# Altium PCB MBOARD.PCBDOC
Units mil, origin at the board's own origin, x right, y up, seen from the top; angles counter-clockwise.
Board outline 6265 x 3760 mil, 2 copper layers (Top Layer, Bottom Layer); 31 components, 23 nets, 121 pads, 15 vias.
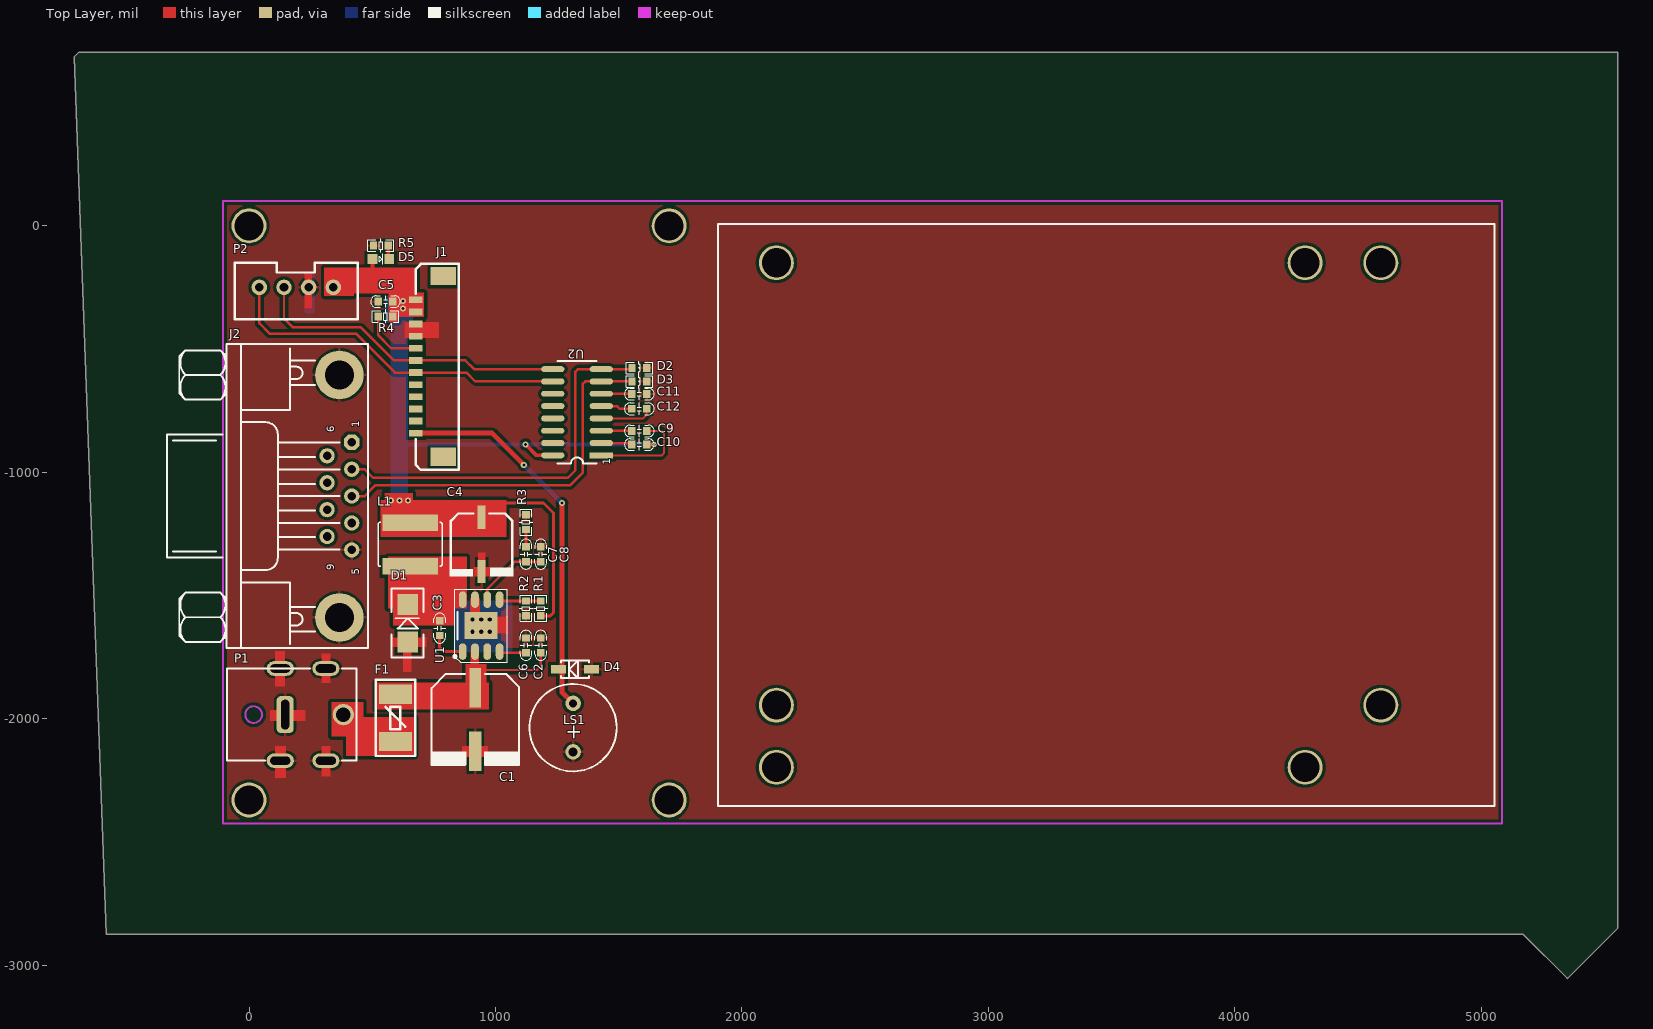
[diagram p0: Top Layer view]
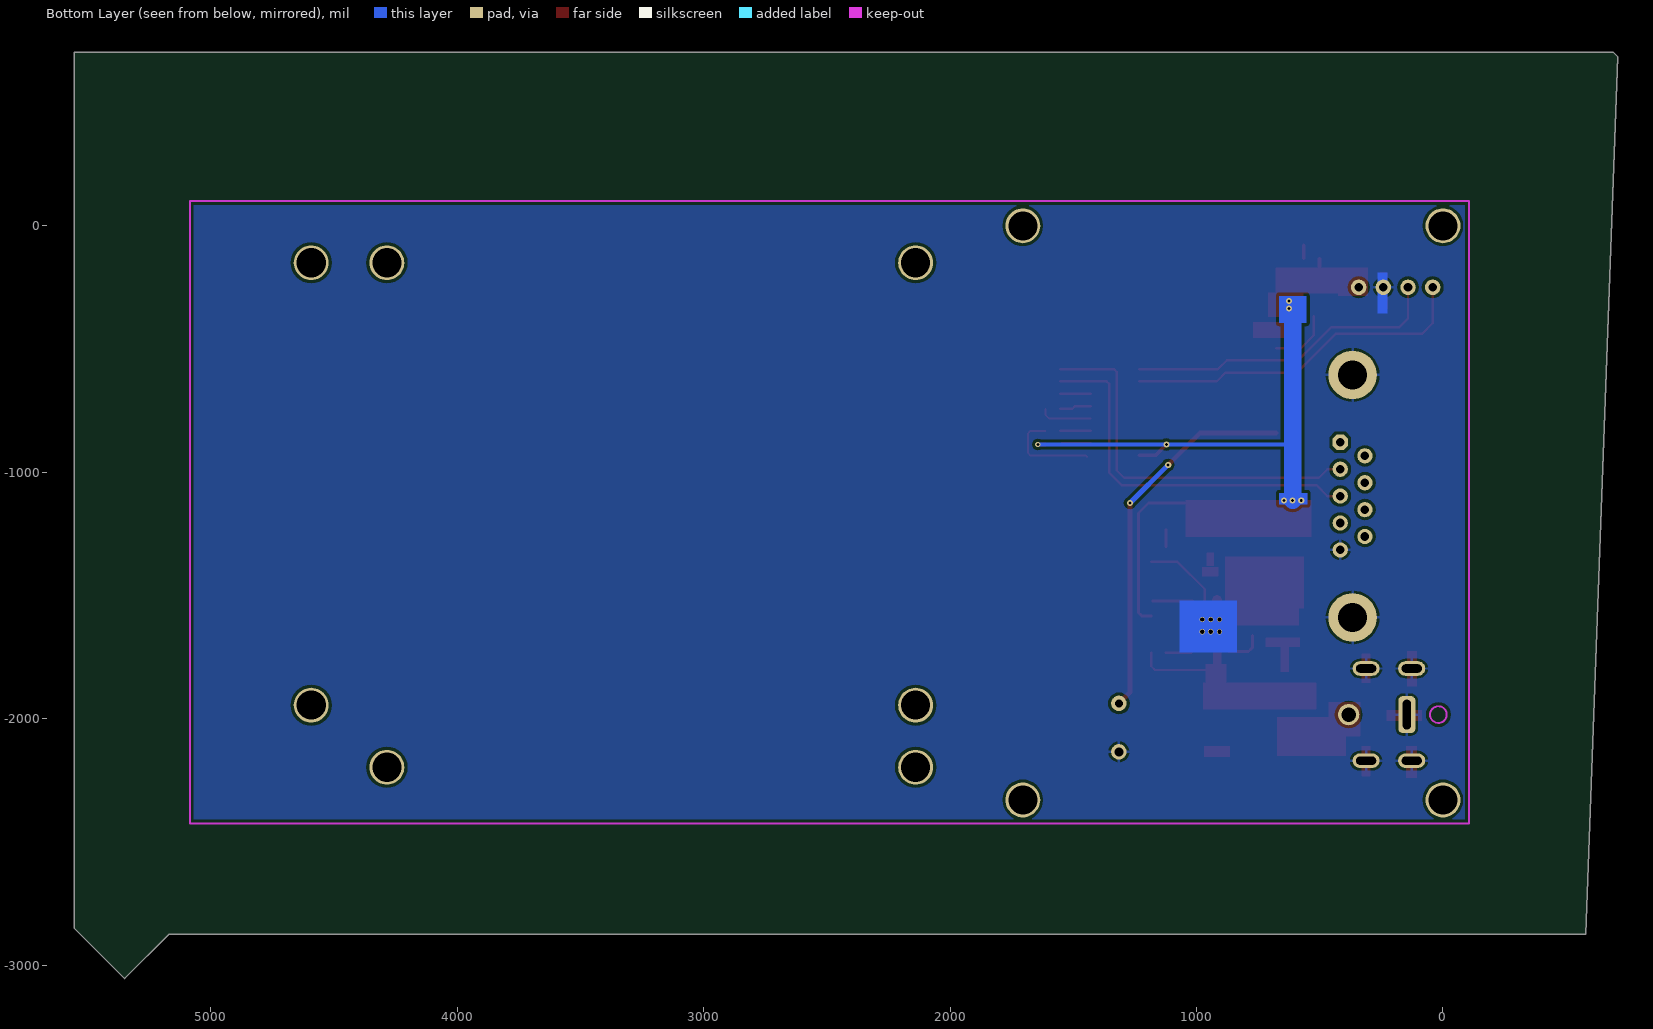
[diagram p1: Bottom Layer view, seen from below]

## Layer stack, top to bottom
Top Solder: solder mask 0.4, Solder Resist, Dk 3.5
Top Layer: signal copper 1.4
Dielectric1: core 12.6, FR-4, Dk 4.8
Bottom Layer: signal copper 1.4
Bottom Solder: solder mask 0.4, Solder Resist, Dk 3.5

## Board outline
-710,685 -690,705 5555,705 5555,-2850 5350,-3055 5170,-2875 -580,-2875

## Design rules (kind name [scope] priority, off if disabled: settings)
Clearance [All] p1: gap=12
ComponentClearance [All] p1 off: gap=10 collisioncheckmode=3 verticalgap=10 showdistances=FALSE
FabricationTestPointUsage TestPointUsage [All] p1: valid=0 allowmultiple=FALSE
FabricationTestpoint Testpoint [(IsPad And (OnTopLayer Or OnBottomLayer))] p1: side=3 testpointundercomponent=TRUE minsize=40 maxsize=100 preferedsize=60 minholesize=0 maxholesize=40 preferedholesize=32 testpointgrid=1 allowsidetop=TRUE allowsidebottom=TRUE usegrid=TRUE gridtolerance=0.01
HoleSize [All] p1: absolutevalues=TRUE maxlimit=100 minlimit=0 maxpercent=80.000 minpercent=20.000
PolygonConnect [All] p1: connectstyle=Relief reliefconductorwidth=12 reliefentries=4 polygonreliefangle="90 Angle" airgapwidth=10
RoutingVias [All] p1: holewidth=15 width=25 viastyle="Through Hole" minholewidth=8 minwidth=15 maxholewidth=80 maxwidth=50
SolderMaskExpansion [All] p1: expansion=4
Width [All] p1: maxlimit=100 minlimit=8 preferedwidth=10 minimp=50.000000 maximp=50.000000 favimp=50.000000
26 further rules are at their usual default settings.

## Components (designator, comment, footprint, x,y, rotation, side; value= is the part's Value field where it differs from the comment)
C1 "Cap Pol1" C8x10-SMD 917.78,-2003.52 r270 top
C2 "Cap" 0603C 1183.78,-1702.52 r180 top
C3 "Cap" 0603C 773.78,-1632.52 r0 top
C4 "Cap Pol1" C6.3x5.4-SMD 943.78,-1292.52 r270 top
C5 "Cap" 0603C 553.78,-307.52 r270 top
C6 "Cap" 0603C 1123.78,-1702.52 r180 top
C7 "Cap" 0603C 1123.78,-1332.52 r0 top
C8 "Cap" 0603C 1183.78,-1332.52 r0 top
C9 "0.1uF" 0603C 1583.78,-832.52 r270 top
C10 "0.1uF" 0603C 1583.78,-887.52 r90 top
C11 "0.1uF" 0603C 1583.78,-682.52 r90 top
C12 "0.1uF" 0603C 1583.78,-742.52 r270 top
D1 "SS54" SMA 643.78,-1612.52 r90 top
D2 "ESD" 0603L 1583.78,-577.52 r270 top
D3 "ESD" 0603L 1583.78,-632.52 r270 top
D4 "1N4007W" SOD-123 1390,-1800 r270 top
D5 "LED" 0603-LED 535,-135 r0 top
F1 "Fuse Thermal" 1812F 593.78,-2092.52 r90 top
J1 "Interface" 1.25-12P 676.78,-180.52 r270 top
J2 "DB9" DB-9/M 416.78,-878.52 r0 top
L1 "Inductor" L-6045 653.78,-1382.52 r90 top
LS1 "Bell" BEEP-9x5.5 1315,-2135 r90 top
P1 "POW" DC-5525 126.78,-2170.52 r90 top
P2 "TTL" XH2.54-4P 241.78,-249.52 r180 top
R1 "Res Semi" 0603R 1183.78,-1552.52 r0 top
R2 "Res Semi" 0603R 1123.78,-1552.52 r0 top
R3 "Res Semi" 0603R 1123.78,-1202.52 r0 top
R4 "Res Semi" 0603R 553.78,-367.52 r270 top
R5 "Res1" 0603R 535,-80 r90 top
U1 "TPS54331" SOP8-POW 941.78,-1622.52 r90 top
U2 "SP3232EEN" SOIC16-1.27 1333.78,-782.52 r180 top

## Footprints (in the part's own frame and the unit in brackets; to place one, negate y for a bottom-side part, rotate by r counter-clockwise, add the part's x,y. Pads: shape width x height; smd on the part's side, far side on the other; paste and mask are expansions set on the pad)
1.25-12P [mm]
  rect 1.9x2.6 smd: 0(0.591,2.835) 0(19.241,2.835)
  rect 0.7x1.4 smd: 1(16.791,0) 2(15.541,0) 3(14.291,0) 4(13.041,0) 5(11.791,0) 6(10.541,0) 7(9.291,0) 8(8.041,0) 9(6.791,0) 10(5.541,0) 11(4.291,0) 12(3.041,0)
  silkscreen extent -0.66,0 20.57,4.45
0603-LED [mm]
  rect 1x1 smd: 1(-0.864,0) 2(0.864,0)
  silkscreen extent -0.18,-0.51 0.18,0.56
0603C [mil]
  rect 31.5x30 smd: 1(0,30) 2(0,-30)
  silkscreen extent -24,-60 24,60
0603L [mil]
  rect 31.5x30 smd: 1(-0.91,-29.91) 2(-0.91,30.09)
  silkscreen extent -28,-54 27,54
0603R [mil]
  rect 31.5x30 smd: 1(0,30) 2(0,-30)
  silkscreen extent -28,-53 28,53
1812F [mm]
  rect 2x3.4 smd: 1(0,0) 2(4.85,0)
  silkscreen extent -1.5,-2.03 6.35,2.03
BEEP-9x5.5 [mm]
  round 1.6 hole 0.8: 1(5,0)
  round 1.6 hole 0.9: 2(0,0)
  silkscreen extent -2,-4.5 7,4.5
C6.3x5.4-SMD [mm]
  rect 2.4x0.85 smd: 1(-2.794,0) 2(2.794,0)
  silkscreen extent -3.18,-3.3 3.3,3.3, body extent -3.24,-3.18 3.24,3.18, height 3.5
C8x10-SMD [mm]
  rect 4.1x1.148 smd: 1(-3.277,0)
  rect 4.1x1.25 smd: 2(3.277,0)
  silkscreen extent -4.7,-4.5 4.7,4.5, body extent -4.65,-4.25 4.65,4.25, height 10.5
DB-9/M [mil]
  oct 62x62 hole 35: 1(0,0)
  round 62 hole 35: 2(0,-109.17) 3(0,-218.33) 4(0,-327.5) 5(0,-436.67) 6(-100,-55) 7(-100,-164.17) 8(-100,-273.33) 9(-100,-382.5)
  round 196.67 hole 118.33: BO1(-50,-710.83) BO2(-50,273.33)
  silkscreen extent -750,-835 67,398
DC-5525 [mm]
  oval 1.5x2.8 hole 0.85 slot 2.06 at 90 deg: 1(0,0) 1(0,-4.7) 1(9.5,-4.7) 1(9.5,0)
  rrect50% 3.8x1.75 hole 0.83 slot 3.05 at 0 deg: 1(4.75,-0.5)
  round 2.2 hole 1.5: 2(4.75,-6.5)
  Keep-Out Layer circle w0.2: c4.75,2.75 r0.86
  silkscreen extent 0,-7.87 9.53,5.5
L-6045 [mm]
  rect 1.7x5.7 smd: 1(0,0) 2(4.5,0)
  silkscreen extent 0,-3.3 4.57,3.3
SMA [mm] "Molded Diode, 2-Leads, Body 4.3x2.7mm, IPC Medium Density"
  rect 2.15x2.15 smd: 1(-1.93,0) 2(1.93,0)
  silkscreen extent -3.56,-1.65 3.56,1.65, body extent -2.28,-1.42 2.29,1.42, height 2.95
SOD-123 [mm]
  rect 0.85x1.524 smd: 1(0,0) 2(0,-3.4)
  silkscreen extent -0.9,-3.15 0.9,-0.25
SOIC16-1.27 [mm]
  rect 2.4x0.6 smd: 1(-2.432,3.787)
  oval 2.4x0.6 smd: 2(-2.432,2.517) 3(-2.432,1.247) 4(-2.432,-0.023) 5(-2.432,-1.293) 6(-2.432,-2.563) 7(-2.432,-3.833) 8(-2.432,-5.103) 9(2.568,-5.103) 10(2.568,-3.833) 11(2.568,-2.563) 12(2.568,-1.293) 13(2.568,-0.023) 14(2.568,1.247) 15(2.568,2.517) 16(2.568,3.787)
  silkscreen extent -1.93,-5.96 2.07,4.64
SOP8-POW [mm]
  oval 1.7x0.8 smd: 1(-2.675,1.905) 2(-2.675,0.635) 3(-2.675,-0.635) 4(-2.675,-1.905) 5(2.675,-1.905) 6(2.675,-0.635) 7(2.675,0.635) 8(2.675,1.905)
  rect 2.8x3.4 smd: 9(0,0)
  silkscreen extent -3.78,-2.7 3.77,2.82
XH2.54-4P [mil]
  round 63 hole 35.5: 1(-100,0) 2(0,0) 3(100,0) 4(200,0)
  silkscreen extent -200,-100 300,130

## Part data
C1 C4: "Polarized Capacitor (Radial)"
C2 C3 C5 C6 C7 C8: "Capacitor"
C9 C10 C11 C12: library part 电容, "电容"
D1: library part "D Schottky", "Schottky Diode"
D2 D3: library part 电感
D4: library part "Diode 1N5408", "3 Amp Medium Power Silicon Rectifier Diode"
D5: library part LED1, "Typical RED GaAs LED"
F1: "Thermal Fuse"
J1: library part "Header 12", "Header, 12-Pin"
LS1: "Electrical Bell"
P1: library part "Header 2", "Header, 2-Pin"
P2: library part "Header 4", "Header, 4-Pin"
R1 R2 R3 R4: "Semiconductor Resistor"
R5: "Resistor"
U2: library part MAX232ESE

## Free pads (board coordinates)
  round 141.73 hole 118.11: 8(0,-2330) 8(0,0) 8(1705,-2330) 8(1705,0) 8(2140,-2197.24) 8(2140,-1945.28) 8(2140,-150) 8(4285.67,-2197.24) 8(4285.67,-150) 8(4592.76,-1945.28) 8(4592.76,-150)

## Via types
v1: diameter 25, hole 12, Top Layer to Bottom Layer, 8 vias
v2: diameter 22, hole 18, Top Layer to Bottom Layer, 6 vias
v3: diameter 22, hole 12, Top Layer to Bottom Layer, 1 vias

## Nets (pads, with @x,y where several pads share a name; then routed paths per layer and width w, separated by ;. In a path a pad name is that pad's centre, name@x,y a point inside that pad or via, vN(x,y) a via of type N, cw(c..) or ccw(c..) an arc to the next point about the centre after c; other vN are vias at no path point)
+5V: C4.1 C5.1 C10.2 D5.1 J1.11 J1.12 L1.2 P2.1 R1.2 R4.1 U2.16 | length 2728.7
  Top Layer w12: 1025,-1125 1195,-1125 1235,-1165 1235,-1570 1222.48,-1582.52 R1.2
  Top Layer w15: 501,-216 D5.1 ; v1(1122.52,-887.52) 1166.61,-931.61 U2.16 ; C10.2 v3(1643.78,-887.52)
  Bottom Layer w15: 612.52,-887.52 v3(1643.78,-887.52)
  Bottom Layer w70: v1(610,-1115) 610,-345
  other v1: 575,-1115 645,-1115 625,-335 625,-305
GND: C1.2 C2.2 C4.2 C5.2 C6.2 C8.1 C11.2 D1.1 D2.2 D3.2 D4.1 J1.9 J1.10 J2.5 J2.BO1 J2.BO2 LS1.2 P1.1 P2.2 R2.2 R3.1 R5.1 U1.7 U1.9 U2.15 | length 80.3
  Top Layer w40: U1.9@916.78,-1597.52 U1.7
  other v2: 906.78,-1647.52 941.78,-1647.52 976.78,-1647.52 906.78,-1597.52 941.78,-1597.52 976.78,-1597.52
NetC1_1: C1.1 C2.1 F1.2 U1.2 | length 296.2
  Top Layer w10: 948.78,-1802.52 1168.78,-1802.52 1183.78,-1787.52 C2.1
NetC3_1: C3.1 D1.2 L1.1 U1.8
NetC3_2: C3.2 U1.1 | length 149.3
  Top Layer w12: C3.2 773.78,-1712.52 789.09,-1727.83 U1.1
NetC6_1: C6.1 U1.4 | length 102.3
  Top Layer w12: U1.4@1021.46,-1732.52 C6.1
NetC7_1: C7.1 R3.2 | length 70
  Top Layer w12: C7.1 R3.2
NetC7_2: C7.2 C8.2 U1.6 | length 306.1
  Top Layer w10: U1.6 966.78,-1474.52 1078.78,-1362.52 C7.2 C8.2
NetC9_1: C9.1 U2.1 | length 400.4
  Top Layer w8: U2.1@1443.78,-937.52 1448.78,-932.52 1673.78,-932.52 1683.78,-922.52 1683.78,-842.52 1673.78,-832.52 C9.1
NetC9_2: C9.2 U2.3 | length 123.3
  Top Layer w10: U2.3 C9.2@1552.87,-831.61
NetC10_1: C10.1 U2.2 | length 118.3
  Top Layer w10: U2.2 C10.1@1547.87,-881.61
NetC11_1: C11.1 U2.6 | length 123.3
  Top Layer w10: U2.6 C11.1@1552.87,-681.61
NetC12_1: C12.1 U2.4 | length 215.1
  Top Layer w8: U2.4 1599.69,-781.61 1613.78,-767.52 C12.1
NetC12_2: C12.2 U2.5 | length 128.8
  Top Layer w10: U2.5 1492.87,-731.61 1503.78,-742.52 C12.2
NetD4_2: D4.2 J1.1 LS1.1 | length 1542.4
  Top Layer w20: J1.1 986.58,-841.58 v1(1115,-970) ; v1(1270,-1125) 1270,-1893.15 LS1.1
  Bottom Layer w20: v1(1115,-970) v1(1270,-1125)
NetD5_2: D5.2 R5.2 | length 51
  Top Layer w15: D5.2@565,-131 R5.2
NetF1_1: F1.1 P1.2
NetR1_1: R1.1 R2.1 U1.5 | length 161.7
  Top Layer w12: U1.5@1016.78,-1522.2 R1.1@1178.46,-1522.2
P_EN: J1.8 R4.2 | length 251.3
  Top Layer w10: R4.2 523.78,-443.78 577.09,-497.09 J1.8
RX: J1.7 P2.3 U2.9 | length 1302.3
  Top Layer w10: P2.3 141.78,-375.52 178.78,-412.52 453.78,-412.52 587.57,-546.31 877.57,-546.31 912.87,-581.61 U2.9
RXD: D2.1 J2.2 U2.8 | length 1568.4
  Top Layer w10: J2.2 468.95,-987.69 503.78,-1022.52 1293.78,-1022.52 1323.78,-992.52 1323.78,-592.52 1334.69,-581.61 D2.1@1553.78,-581.61
TX: J1.6 P2.4 U2.10 | length 1434.7
  Top Layer w10: P2.4 41.78,-395.52 83.78,-437.52 433.78,-437.52 591.78,-595.52 881.78,-595.52 917.87,-631.61 U2.10
TXD: D3.1 J2.3 U2.7 | length 1540.7
  Top Layer w10: J2.3 469.45,-1096.85 513.78,-1052.52 1303.78,-1052.52 1353.78,-1002.52 1353.78,-642.52 1364.69,-631.61 D3.1
pads on no net: J1.0 J1.2 J1.3 J1.4 J1.5 J2.1 J2.4 J2.6 J2.7 J2.8 J2.9 U1.3 U2.11 U2.12 U2.13 U2.14

## Polygon pours and split planes (outlines as drawn)
GND on Top Layer "GND_L01_P002" (solid, remove dead copper, pour order 2): -395,305 5195,305 5225,275 5245,255 5245,-2605 -70,-2605 -240,-2775
GND on Bottom Layer "GND_L02_P004" (solid, remove dead copper, pour order 4): -350,325 -325,350 5190,350 5190,-2495 5165,-2520 5085,-2600 -370,-2600

## Keep-outs
Keep-Out Layer:
  lines w8: -105,-2425 5085,-2425 5085,100 -105,100 -105,-2175 -105,-2425

## Other copper
Top Layer:
  rectangle net GND: 225,-335 255,-190
  rectangle net GND: 910,-1422.52 978.78,-1385
  rectangle net GND: 930,-1380 960,-1325
  rectangle net GND: 865,-2155 970,-2110
  rectangle net GND: 625,-1810 660,-1710
  rectangle net GND: 580,-1710 720,-1670
  rectangle net GND: 630,-455 770,-390
  rectangle net GND: 295,-1855 330,-1735
  rectangle net GND: 105,-1870 145,-1725
  rectangle net GND: 295,-2235 330,-2110
  rectangle net GND: 105,-2240 150,-2110
  rectangle net GND: 85,-2010 230,-1965
  rectangle net GND: 995,-1655 1050,-1585
  rectangle net +5V: 565,-335 670,-200
  rectangle net +5V: 385,-275 680,-170
  rectangle net +5V: 305,-285 425,-170
  rectangle net +5V: 565,-391.18 606.78,-275
  rectangle net +5V: 565,-370 710,-270
  rectangle net +5V: 550,-1140 665,-1085
  rectangle net NetC1_1: 877.43,-1872.52 963.78,-1777.52
  rectangle net NetC1_1: 898.78,-1782.52 933.78,-1717.52
  rectangle net +5V: 533.78,-1262.52 1043.78,-1112.52
  rectangle net NetC3_1: 563.78,-1552.52 883.78,-1342.52
  rectangle net NetC3_1: 813.78,-1552.52 883.78,-1472.52
  rectangle net NetC3_1: 583.78,-1622.52 835.48,-1472.52
  rectangle net NetC1_1: 513.78,-1962.52 973.78,-1852.52
  rectangle net NetF1_1: 393.78,-2152.52 436.78,-2032.52
  rectangle net NetF1_1: 413.78,-2151.57 673.78,-1992.52
  rectangle net NetF1_1: 333.78,-2072.52 463.78,-1932.52
Bottom Layer:
  rectangle net GND: 225,-355 265,-190
  rectangle net GND: 835.48,-1732.52 1070,-1520
  rectangle net +5V: 553.78,-395 665,-283.9
  rectangle net +5V: 550,-1130 665,-1085

## Silkscreen, mask and mechanical layers (free items; w line width, h text height)
Top Overlay:
  lines w8: 1903.78,-2354.72 5053.39,-2354.72 5053.39,7.48 1903.78,7.48 1903.78,-2354.72

## Text inside footprints (layer, text, board x,y; h text height)
J2: Top Overlay "9" at 346.78,-1396.85 h30 r90; Top Overlay "5" at 446.78,-1416.85 h30 r90; Top Overlay "1" at 446.78,-816.85 h30 r90; Top Overlay "6" at 346.78,-836.85 h30 r90
LS1: Top Overlay "+" at 1345,-2090 h60 r90
U2: Top Overlay "1" at 1466.54,-970.61 h30 r90